# Altium PCB CAN Expansion V1.PcbDoc
Units mm, origin at the board's own origin, x right, y up, seen from the top; angles counter-clockwise.
Board outline 35.5 x 29.75 mm, 2 copper layers (Top Layer, Bottom Layer); 24 components, 27 nets, 121 pads, 17 vias.
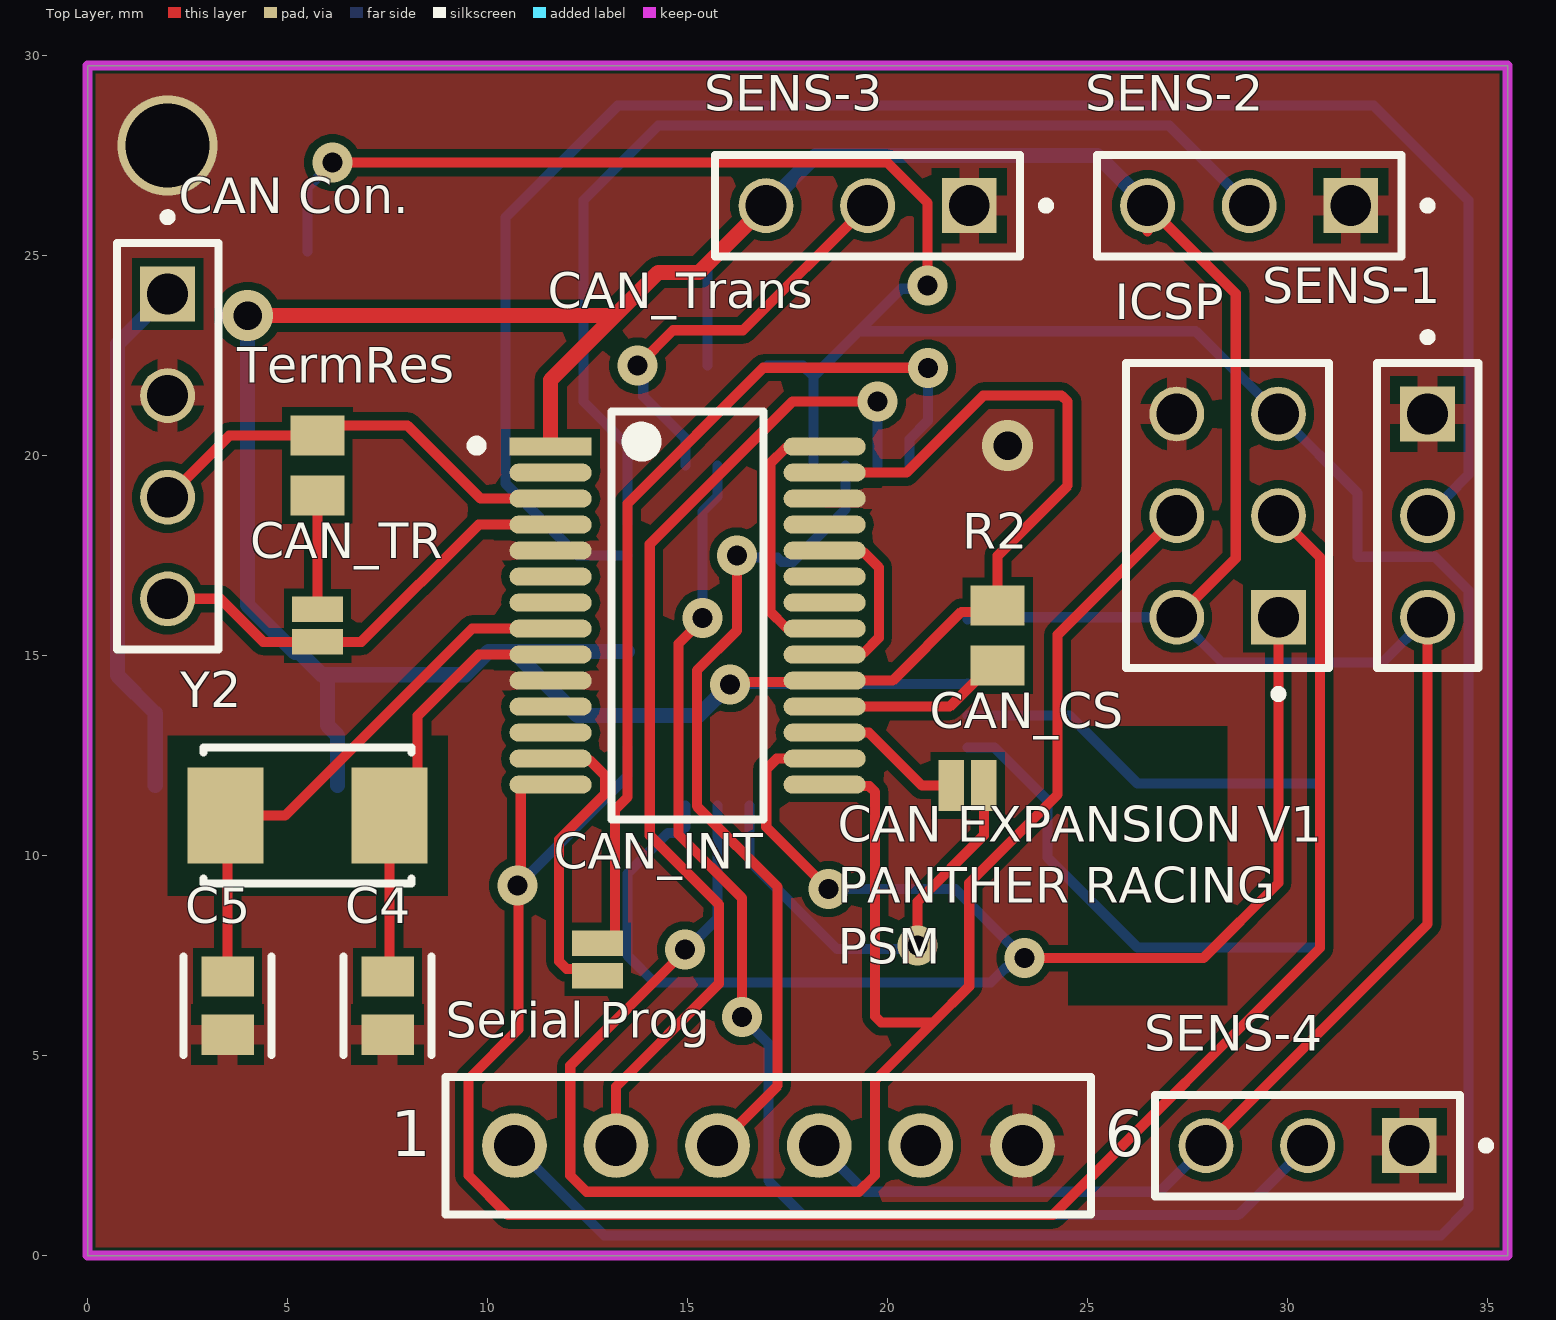
[diagram p0: Top Layer view]
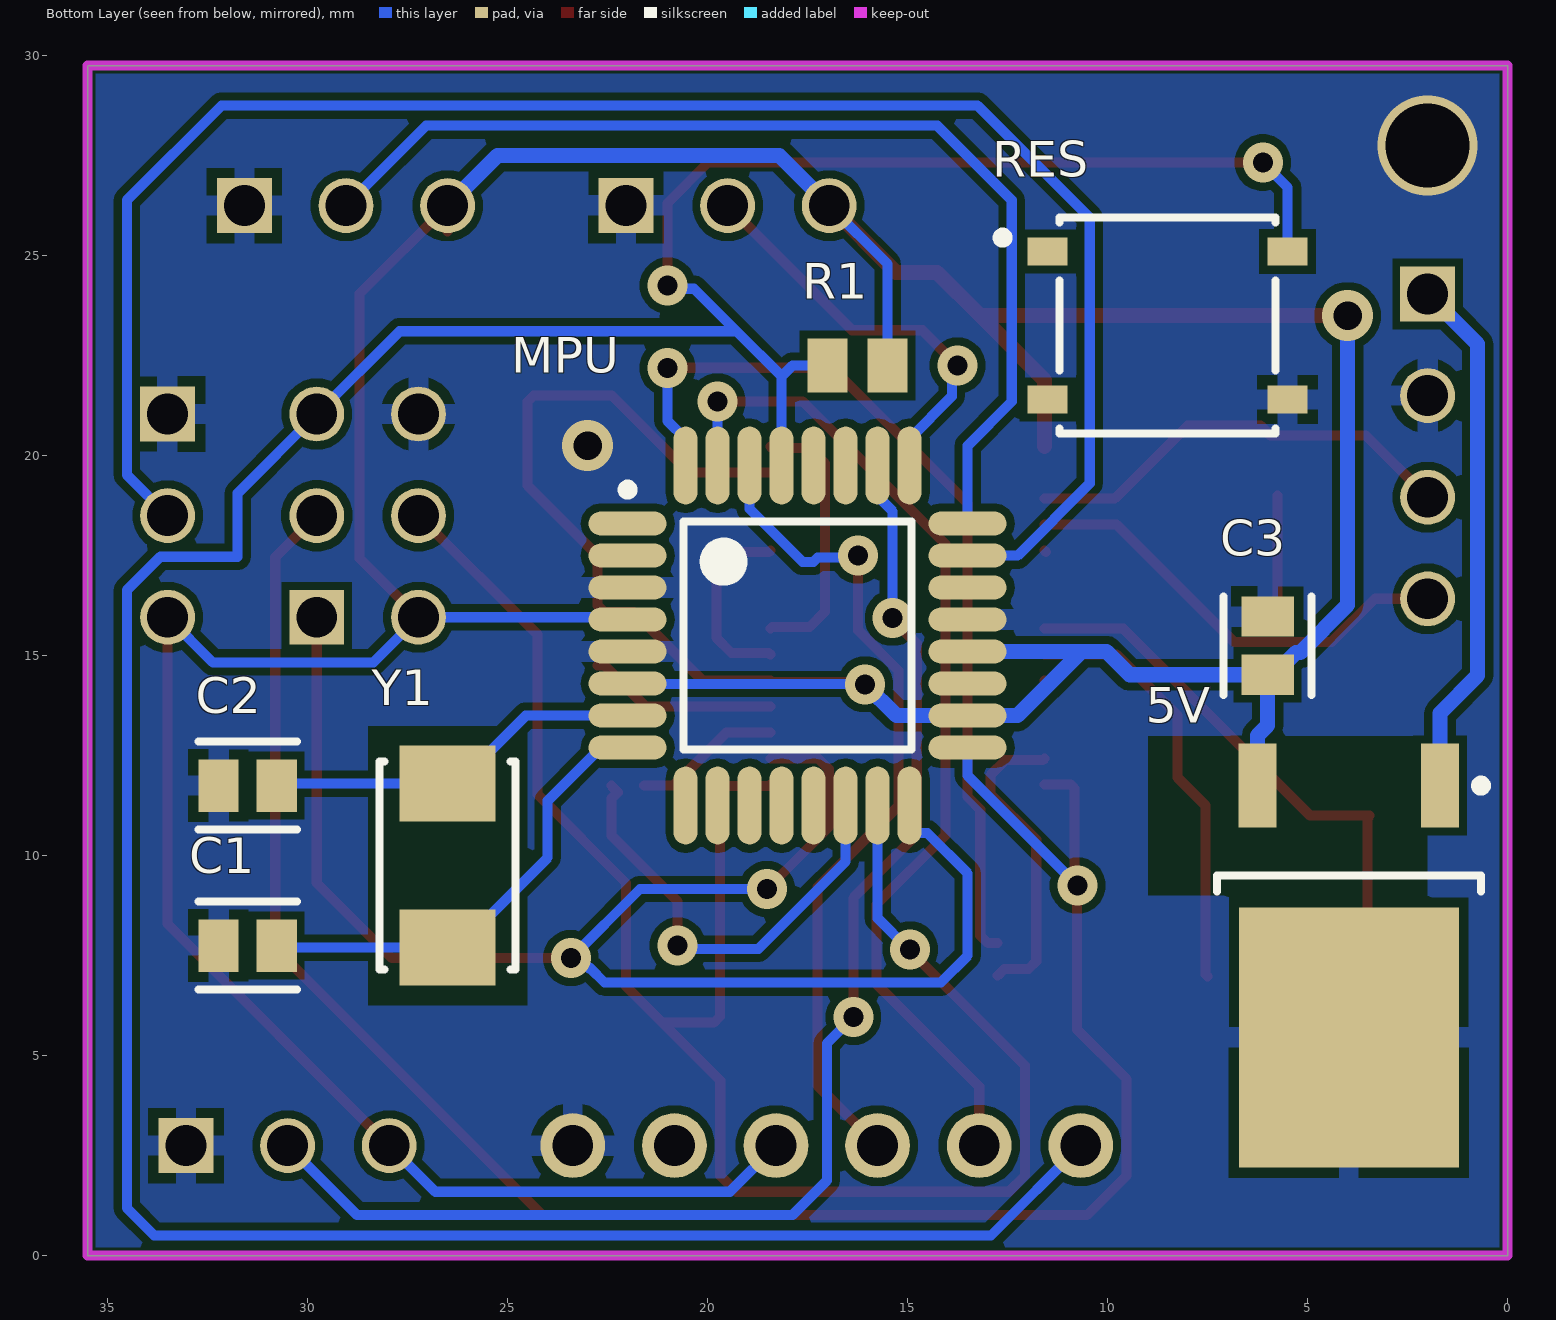
[diagram p1: Bottom Layer view, seen from below]
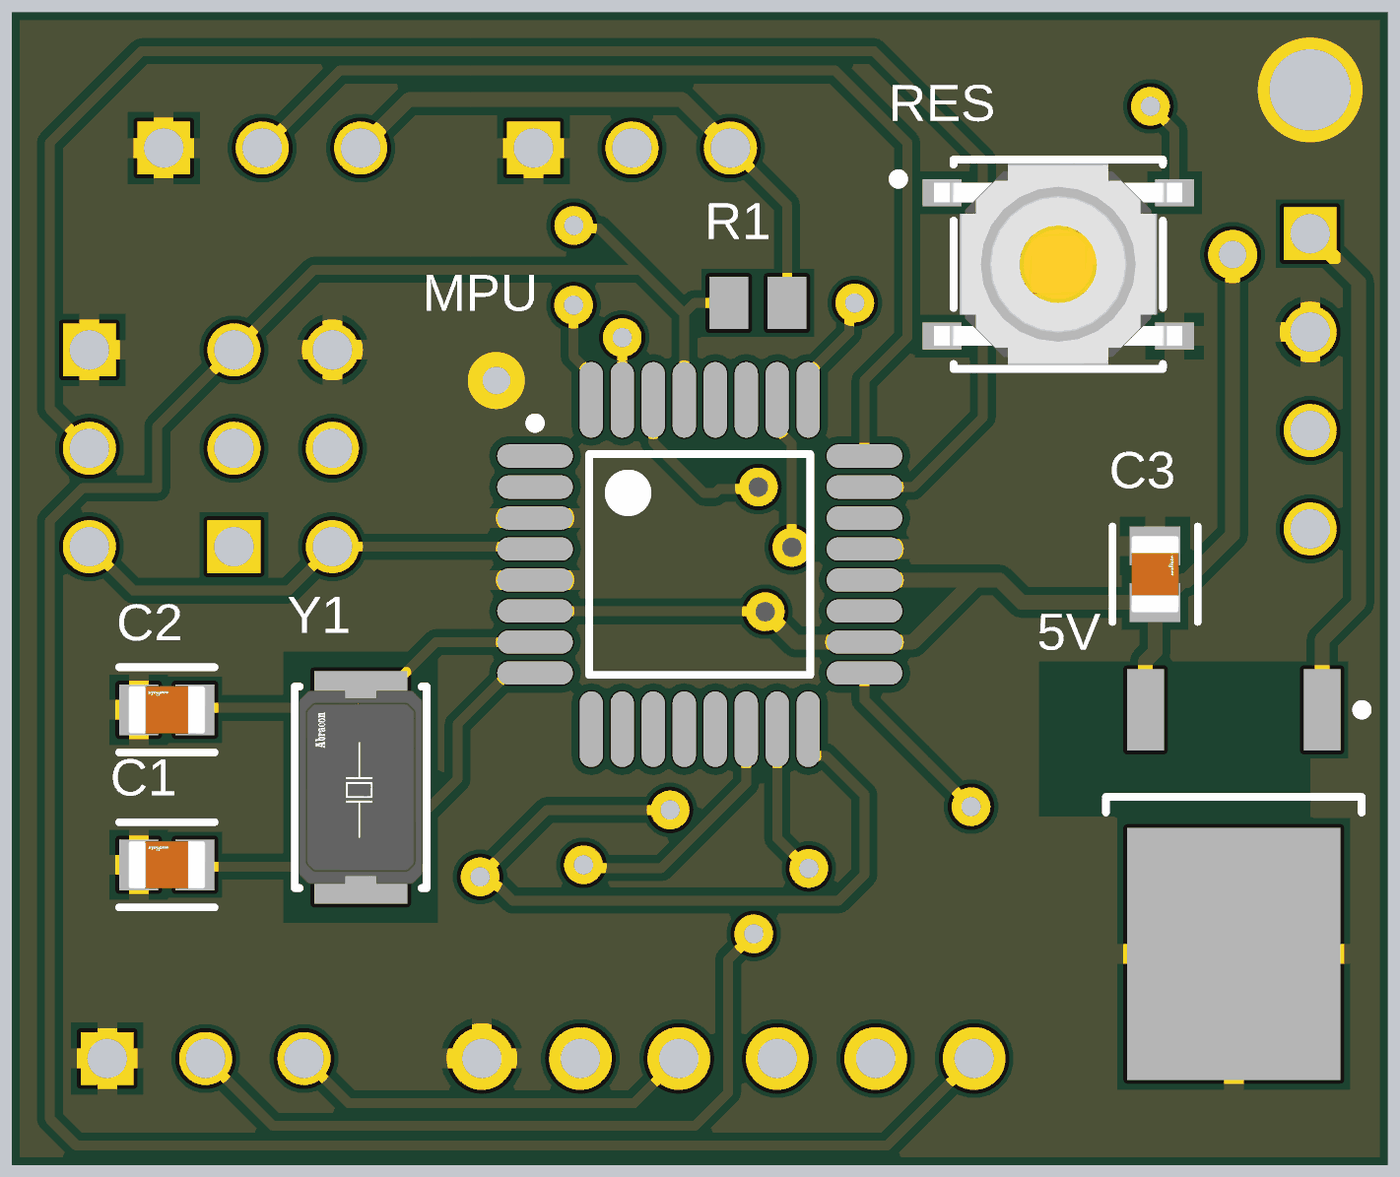
[diagram p2: 3D render of the assembled board from below, using the file's embedded part models]

## Layer stack, top to bottom
Top Solder: solder mask 0.0102, Solder Resist, Dk 3.5
Top Layer: signal copper 0.0356
Dielectric 1: dielectric 0.32, FR-4, Dk 4.8
Bottom Layer: signal copper 0.0356
Bottom Solder: solder mask 0.0102, Solder Resist, Dk 3.5

## Board outline
0,0 0,29.75 35.5,29.75 35.5,0

## Design rules (kind name [scope] priority, off if disabled: settings)
BoardOutlineClearance [All] p1: gap=0.2 ignorepadtopadclearanceinfootprint=FALSE except(0.4: Arc-SplitBarrior Arc-SplitContinuation Track-SplitBarrior Track-SplitContinuation SMDPad-SplitBarrior SMDPad-SplitContinuation THPad-SplitBarrior THPad-SplitContinuation Via-SplitBarrior Via-SplitContinuation Fill-SplitBarrior Fill-SplitContinuation Poly-SplitBarrior Poly-SplitContinuation Region-SplitBarrior Region-SplitContinuation Text-SplitBarrior Text-SplitContinuation)
Clearance "Clearance Bottom Layer" [OnLayer('Bottom Layer')] p1: gap=0.203 ignorepadtopadclearanceinfootprint=TRUE except(0.254: Arc-Text Track-Text SMDPad-Text THPad-Text Via-Text Fill-Text Poly-Text Region-Text Text-Text)
Clearance "Clearance Top Layer" [OnLayer('Top Layer')] p2: gap=0.203 ignorepadtopadclearanceinfootprint=TRUE except(0.254: Arc-Text Track-Text SMDPad-Text THPad-Text Via-Text Fill-Text Poly-Text Region-Text Text-Text)
Clearance [All] p3: gap=0.2 ignorepadtopadclearanceinfootprint=FALSE except(0.089: Arc-Arc Arc-Track Arc-SMDPad Track-Track Track-SMDPad SMDPad-SMDPad; 0.127: Arc-Via Track-Via SMDPad-Via THPad-Via Via-Via; 0.254: Arc-Text Track-Text SMDPad-Text THPad-Text Via-Text Fill-Text Poly-Text Region-Text Text-Text)
HoleSize [All] p1: absolutevalues=TRUE maxlimit=6.3 minlimit=0.2 maxpercent=80.000 minpercent=20.000
MinimumAnnularRing [All] p1: minimumring=0.076
MinimumSolderMaskSliver [All] p1: minsoldermaskwidth=0.1
PolygonConnect PolygonConnect_1 [All] p1: thpad.connectstyle=Relief thpad.reliefconductorwidth=0.508 thpad.reliefentries=4 thpad.polygonreliefangle="90 Angle" thpad.airgapwidth=0.254 smdpad.connectstyle=Relief smdpad.reliefconductorwidth=0.508 smdpad.reliefentries=4 smdpad.polygonreliefangle="90 Angle" smdpad.airgapwidth=0.254 via.connectstyle=Direct via.reliefconductorwidth=0.508 via.reliefentries=4 via.polygonreliefangle="90 Angle" via.airgapwidth=0.254
RoomDefinition "CAN Expansion V1" [InComponentClass('CAN Expansion V1')] p1: confinementstyle=ConfineIn formatcopy=TRUE lockcomponents=FALSE outline 0,0 35.5,0 35.5,29.75 0,29.75
RoutingCorners [All] p1: cornerstyle=Round minsetback=2.54 maxsetback=2.54
RoutingVias [All] p1: holewidth=0.5 width=1 viastyle="Through Hole" minholewidth=0.2 minwidth=0.45 maxholewidth=1 maxwidth=2
SilkToSilkClearance [All] p1: silktosilkclearance=0.1
SilkToSolderMaskClearance [IsPad] p1: minsilkscreentomaskgap=0.1 clearancetoexposedcopper=TRUE
SolderMaskExpansion [All] p1: expansion=0.102 istentingtop=FALSE
Width [All] p1: maxlimit=2.54 minlimit=0.089 preferedwidth=0.254
25 further rules are at their usual default settings.

## Components (designator, comment, footprint, x,y, rotation, side; value= is the part's Value field where it differs from the comment)
5V "L7805CDT-TR" TO-252_N 3.97,7.5 r270 bottom
C1 "22pf" FP-GRM21B-0_15-IPC_C#1 31.5,7.75 r0 bottom
C2 "22pf" FP-GRM21B-0_15-IPC_C#1 31.5,11.75 r0 bottom
C3 ".1uf" FP-GRM21B-0_15-IPC_C#2 6,15.25 r90 bottom
C4 "27pf" FP-GRM21B-0_15-IPC_C#1 7.5,6.25 r270 top
C5 "27pf" FP-GRM21B-0_15-IPC_C#1 3.5,6.25 r270 top
"CAN Con." "TSW-104-07-F-S" SAMTEC_TSW-104-07-F-S 2,20.23 r270 top
CAN_CS "" SMT-JUMPER_2_NO_SILK 22,11.75 r180 top
CAN_INT "" SMT-JUMPER_2_NO_SILK 12.75,7.406 r270 top
CAN_TR "" SMT-JUMPER_2_NO_SILK 5.75,15.75 r90 top
CAN_Trans "MCP25625T-E/SS" FP-C04-073-IPC_B 15,16 r0 top
ICSP "TSW-103-07-F-D" SAMTEC_TSW-103-07-F-D 28.5,18.5 r90 top
MPU "ATmega328P-AU" 32A_M 17.75,15.5 r180 bottom
R1 "10k" RESC2013X60X40LL20T25 16.25,22.25 r180 bottom
R2 "10k" RESC2013X60X40LL20T25 22.75,15.5 r90 top
RES "PTS526SK15SMTR2LFS" FP-PTS526SK15SMTR2LFS-MFG 8.5,23.25 r180 bottom
SENS-1 "TSW-103-07-F-S" SAMTEC_TSW-103-07-F-S 33.5,18.5 r270 top
SENS-2 "TSW-103-07-F-S" SAMTEC_TSW-103-07-F-S 29.04,26.25 r180 top
SENS-3 "TSW-103-07-F-S" SAMTEC_TSW-103-07-F-S 19.5,26.25 r180 top
SENS-4 "TSW-103-07-F-S" SAMTEC_TSW-103-07-F-S 30.5,2.75 r180 top
"Serial Prog" "SAMTEC-TSW-106-07-X-SJ" SAMTEC-TSW-106-07-X-S 17.02,2.75 r0 top
TermRes "120R" RESC2013X60X40LL20T25 5.75,19.75 r270 top
Y1 "ABM3-16.000MHZ-D2Y-T" FP-ABM3-MFG 26.5,9.75 r90 bottom
Y2 "ABM3-8.000MHZ-D2Y-T" FP-ABM3-MFG 5.5,11 r0 top

## Footprints (in the part's own frame and the unit in brackets; to place one, negate y for a bottom-side part, rotate by r counter-clockwise, add the part's x,y. Pads: shape width x height; smd on the part's side, far side on the other; paste and mask are expansions set on the pad)
32A_M [mm] "Thin QFP, 32-Leads, Body 7x7mm, Pitch 0.8mm, IPC Low Density"
  oval 1.95x0.6 smd mask+0.038: 1(-4.25,2.8) 2(-4.25,2) 3(-4.25,1.2) 4(-4.25,0.4) 5(-4.25,-0.4) 6(-4.25,-1.2) 7(-4.25,-2) 8(-4.25,-2.8) 17(4.25,-2.8) 18(4.25,-2) 19(4.25,-1.2) 20(4.25,-0.4) 21(4.25,0.4) 22(4.25,1.2) 23(4.25,2) 24(4.25,2.8)
  oval 0.6x1.95 smd mask+0.038: 9(-2.8,-4.25) 10(-2,-4.25) 11(-1.2,-4.25) 12(-0.4,-4.25) 13(0.4,-4.25) 14(1.2,-4.25) 15(2,-4.25) 16(2.8,-4.25) 25(2.8,4.25) 26(2,4.25) 27(1.2,4.25) 28(0.4,4.25) 29(-0.4,4.25) 30(-1.2,4.25) 31(-2,4.25) 32(-2.8,4.25)
  silkscreen extent -4.38,-2.85 2.85,3.77, body extent -3.5,-3.5 3.5,3.5, height 1.2
FP-ABM3-MFG [mm]
  rect 1.9x2.4 smd: 1(-2.05,0) 2(2.05,0)
  silkscreen extent -2.6,-1.7 2.6,1.7, body extent -2.5,-1.6 2.5,1.6, height 1.3
FP-C04-073-IPC_B [mm]
  rect 2.053x0.455 smd paste+0 mask+0.038: 1(-3.425,4.225)
  rrect100% 2.053x0.455 smd paste+0 mask+0.038: 2(-3.425,3.575) 3(-3.425,2.925) 4(-3.425,2.275) 5(-3.425,1.625) 6(-3.425,0.975) 7(-3.425,0.325) 8(-3.425,-0.325) 9(-3.425,-0.975) 11(-3.425,-2.275) 12(-3.425,-2.925) 13(-3.425,-3.575) 14(-3.425,-4.225) 15(3.425,-4.225) 16(3.425,-3.575) 17(3.425,-2.925) 18(3.425,-2.275) 19(3.425,-1.625) 20(3.425,-0.975) 21(3.425,-0.325) 22(3.425,0.325) 23(3.425,0.975) 24(3.425,1.625) 25(3.425,2.275) 26(3.425,2.925) 27(3.425,3.575) 28(3.425,4.225)
  rrect100% 2.053x0.455 smd mask+0.038: 10(-3.425,-1.625)
  silkscreen extent -5.4,-5.1 1.9,5.1, body extent -4.7,-5.35 4.7,5.35, height 0.25
FP-GRM21B-0_15-IPC_C#1 [mm]
  rect 1.006x1.308 smd: 1(-0.726,0) 2(0.726,0)
  silkscreen extent -1.23,-1.1 1.23,1.1, body extent -1,-0.63 1,0.63, height 1.4
FP-GRM21B-0_15-IPC_C#2 [mm]
  rect 1.006x1.308 smd paste+0 mask+0: 1(-0.726,0) 2(0.726,0)
  silkscreen extent -1.23,-1.1 1.23,1.1, body extent -1,-0.63 1,0.63, height 1.4
FP-PTS526SK15SMTR2LFS-MFG [mm]
  rect 1x0.7 smd paste+0 mask+0: 1(-3,1.85) 2(3,1.85) 3(-3,-1.85) 4(3,-1.85)
  silkscreen extent -4.25,-2.7 2.7,2.7, body extent -3.2,-2.6 3.2,2.6, height 1.65
RESC2013X60X40LL20T25 [mm] "Chip Resistor, 2-Leads, Body 2.00x1.25mm, IPC High Density"
  rect 1x1.35 smd: 1(-0.75,0) 2(0.75,0)
  body extent -1.1,-0.72 1.1,0.72, height 0.6
SAMTEC-TSW-106-07-X-S [mm]
  round 1.62 hole 1.02: 1(-6.35,0) 2(-3.81,0) 3(-1.27,0) 4(1.27,0) 5(3.81,0) 6(6.35,0)
  silkscreen extent -8.07,-1.72 8.07,1.72
SAMTEC_TSW-103-07-F-D [mm]
  rect 1.37x1.37 hole 1.02: 01(-2.54,-1.27)
  round 1.37 hole 1.02: 02(-2.54,1.27) 03(0,-1.27) 04(0,1.27) 05(2.54,-1.27) 06(2.54,1.27)
  silkscreen extent -4.56,-2.54 3.81,2.54
SAMTEC_TSW-103-07-F-S [mm]
  rect 1.37x1.37 hole 1.02: 01(-2.54,0)
  round 1.37 hole 1.02: 02(0,0) 03(2.54,0)
  silkscreen extent -4.56,-1.27 3.81,1.27
SAMTEC_TSW-104-07-F-S [mm]
  rect 1.37x1.37 hole 1.02: 01(-3.81,0)
  round 1.37 hole 1.02: 02(-1.27,0) 03(1.27,0) 04(3.81,0)
  silkscreen extent -5.83,-1.27 5.08,1.27
SMT-JUMPER_2_NO_SILK [mil]
  rect 25x50 smd paste+0: 1(-16,0) 2(16,0)
TO-252_N [mm] "D-PAK, 4-Leads, Body 6.1x6.5mm, Pitch 2.28mm, Lead Span 9.7mm, IPC Medium Density"
  rect 2.1x0.95 smd: 1(-4.25,2.28) 3(-4.25,-2.28)
  rect 6.5x5.5 smd: 4(2.05,0)
  silkscreen extent -4.37,-3.3 -1.6,3.43, body extent -2,-3.3 4.2,3.3, height 2.4

## Part data
5V: library part CMP-0244-00216-1, "Positive Voltage Regulator, 3-Pin DPAK, Tape and Reel", ComponentLink1Description="Manufacturer URL", ComponentLink1URL=http://www.st.com, ComponentLink2Description=Datasheet, ComponentLink2URL=http://www.st.com/internet/com/TECHNICAL_RESOURCES/TECHNICAL_LITERATURE/DATASHEET/CD00000444.pdf, DatasheetVersion=16/11/2011, PackageDescription="3-Pin Transistor Outline Package 2.28 mm Pitch, 9.7 mm Lead Span (DPAK)", PackageReference=TO-252, PackageVersion=2011
C1 C2 C3 C4 C5: library part CMP-2007-03541-2, "Chip Multilayer Ceramic Capacitors for General Purpose, 0805, 10uF, X5R, 15%, 10%, 25V", Capacitance=10uF, Case Code (Imperial)=0805, Case Code (Metric)=2012, Dielectric=X5R, Max Operating Temperature=85°C, Min Operating Temperature=-55°C, Package Quantity=1, Tolerance=10%, Voltage=25V, Case/Package=0805, Depth=1.25mm, Height=1.25mm, Lead Free="Lead Free", Length=2mm, Material=Ceramic, Mount="Surface Mount", Packaging="Tape and Reel", Radiation Hardening=No, Termination=SMD/SMT, Thickness=0.053inch, Voltage Rating=25V, Voltage Rating (DC)=25V, Width=0.049inch
"CAN Con." ICSP SENS-1 SENS-2 SENS-3 SENS-4: Package=None, Availability=Unavailable, MF=Samtec, Price=None
  "CAN Con.": MP=TSW-104-07-F-S
  ICSP: MP=TSW-103-07-F-D
  SENS-1 SENS-2 SENS-3 SENS-4: MP=TSW-103-07-F-S
CAN_CS CAN_INT CAN_TR: library part JUMPER-SMT_2_NO_SILK, Package=SMT-JUMPER_2_NO_SILK, DeviceName=_SILK, DeviceSetName=JUMPER-SMT_2_NO, GateName_1=G$1, LibraryName=SparkFun-Jumpers, SymbolName_1=SMT-JUMPER_2_NO
CAN_Trans: library part CMP-06279-000016-1, "IC TRANSCEIVER 1/1 28SSOP", Case/Package=SSOP, Max Operating Temperature=125°C, Max Supply Voltage=5.5V, Min Operating Temperature=-40°C, Min Supply Voltage=4.5V, Operating Supply Current=70mA, Package Quantity=2100, Data Rate=1Mbps, Interface=SPI, Mount="Surface Mount", Number of Drivers=1, Number of Pins=28, Number of Receivers=1, Number of Transceivers=1, Packaging="Tape and Reel", Propagation Delay=125ns, Receiver Hysteresis=200mV, RoHS Compliant=Yes, Weight=0.080001oz
MPU: library part CMP-0095-00269-2, "8-bit AVR Microcontroller, 32KB Flash, 1KB EEPROM, 2KB SRAM, 32-pin TQFP, Industrial Grade (-40°C to 85°C)", Code_JEDEC=MS-026-ABA, ComponentLink1Description="Manufacturer URL", ComponentLink1URL=http://www.atmel.com/, ComponentLink2Description="ATmega48A/48PA/88A/88PA/168A/168PA/328/328P Datasheet", ComponentLink2URL=http://www.atmel.com/dyn/resources/prod_documents/doc8271.pdf, ComponentLink3Description="ATmega48A/48PA/88A/88PA/168A/168PA/328/328P Summary", ComponentLink3URL=http://www.atmel.com/dyn/resources/prod_documents/8271S.pdf, DatasheetVersion="revD, May-2011", PackageDescription="32-Lead, 7x7x1.0 mm Body, 0.8mm Lead Pitch, Thin Profile Plastic Quad Flat Package (TQFP)", PackageReference=32A, PackageVersion="revC, Oct-2010", RevisionNote="DatasheetVersion & PackageVersion updated. URLs added."
R1 R2 TermRes: library part CMP-2001-00645-1, Manufacturer=Panasonic, Part Number=ERA6AEB473V
RES: library part CMP-10040-000013-1, "TACT 5.2 X 5.2, 1.5 MM H, 260GF,", Contact Current Rating=50mA, Contact Resistance=100mΩ, Manufacturer=C&K, Operating Force=250gf, Temperature="-20°C to +70°C", Temperature Range High=+70°C, Temperature Range Low=-20°C, Voltage Rating Dc=12V, Automotive=No, Category=Switch, ComponentLink2Description=Datasheet, ComponentLink2URL=https://www.ckswitches.com/media/2780/pts526.pdf, Device Class L1=Electromechanical, Device Class L2=Switches, Device Class L3="Tactile Switches", Digikey Description="TACT 5.2 X 5.2, 1.5 MM H, 260GF,", Electromechanical Life=200000Cycles, Height=1.65mm, Lead Free=Yes, Manufacturer Part Number=PTS526SK15SMTR2LFS, Octopart=https://octopart.com/pts526+sk15+smtr2+lfs-c%26k+components-100617999, Package=PTS526SK15SMTR2LFS, RoHS=TRUE, Standoff Height=0mm, Throw Configuration=SPST-NO
Y1: library part CMP-27762-004490-1, "Crystal 16MHz ±20ppm 18pF SMD-2 5mm x 3.2mm", Case/Package=SMD/SMT, ESR (Equivalent Series Resistance)=40R, Frequency=16MHz, Frequency Stability=30ppm, Frequency Tolerance=20ppm, Load Capacitance=18pF, Max Operating Temperature=85°C, Min Operating Temperature=-40°C, Operating Frequency="16 MHz", Package Quantity=1000, Resistor Type=Ceramic, Height=0.051inch, Lead Free="Lead Free", Length=0.197inch, Mount="Surface Mount", Number of Pins=2, Packaging="Tape and Reel", RoHS Compliant=Yes, Series=ABM3, Series Resistance=40R, Termination=SMD/SMT, Tolerance=20ppm, Width=0.126inch
Y2: library part CMP-2000-05033-2, "Crystal 8MHz ±20ppm 18pF SMD-2 5mm x 3.2mm", Case/Package=CSMD, ESR (Equivalent Series Resistance)=140R, Frequency=8MHz, Frequency Stability=30ppm, Frequency Tolerance=20ppm, Load Capacitance=18pF, Max Operating Temperature=85°C, Min Operating Temperature=-40°C, Package Quantity=1000, Resistor Type=Ceramic, Series Resistance=500R, Depth=3.2mm, Height=0.051inch, Lead Free="Lead Free", Length=5mm, Mount="Surface Mount", Number of Pins=2, Packaging="Tape and Reel", Radiation Hardening=No, RoHS Compliant=Yes, Termination=SMD/SMT, Tolerance=20ppm, Width=3.2mm

## Via types
v1: diameter 1, hole 0.5, Top Layer to Bottom Layer, 14 vias
v2: diameter 1.27, hole 0.711, Top Layer to Bottom Layer, 2 vias
v3: diameter 2.5, hole 2.1, Top Layer to Bottom Layer, 1 vias

## Nets (pads, with @x,y where several pads share a name; then routed paths per layer and width w, separated by ;. In a path a pad name is that pad's centre, name@x,y a point inside that pad or via, vN(x,y) a via of type N, cw(c..) or ccw(c..) an arc to the next point about the centre after c; other vN are vias at no path point)
A0: MPU.23 SENS-1.02 | length 44.3
  Bottom Layer w0.254: MPU.23 12.25,17.5 10.445,19.305 10.445,25.945 13.25,28.75 32.155,28.75 34.519,26.386 34.519,19.519 34,19
A1: MPU.24 SENS-2.02 | length 26.8
  Bottom Layer w0.254: MPU.24 13.5,20.25 12.395,21.355 12.395,26.386 14.259,28.25 27.04,28.25 SENS-2.02
A2: MPU.25 SENS-3.02 | length 10.4
  Top Layer w0.254: v1(13.75,22.25) 14.635,23.135 16.385,23.135 SENS-3.02
  Bottom Layer w0.254: v1(13.75,22.25) 13.893,22.107 13.893,21.482 14.95,20.425 MPU.25
A3: MPU.26 SENS-4.02 | length 33.8
  Top Layer w0.254: v1(15.374,15.944) 15.374,15.9 14.773,15.299 14.773,10.527 16.356,8.945 v1(16.356,5.966)
  Bottom Layer w0.254: v1(15.374,15.944) 15.374,18.606 15.75,18.981 MPU.26 ; v1(16.356,5.966) 17.018,5.304 17.018,1.875 17.882,1.012 28.762,1.012 SENS-4.02
CAN_CS: CAN_CS.2 CAN_Trans.17 | length 3.7
  Top Layer w0.254: CAN_Trans.17 19.534,13.075 20.859,11.75 CAN_CS.2
CAN_INT: CAN_INT.2 CAN_Trans.13 | length 7.8
  Top Layer w0.254: CAN_Trans.13 11.613,12.387 12.551,12.387 12.931,12.006 12.931,11.542 11.785,10.395 11.785,7.359 11.978,7.165 12.585,7.165 CAN_INT.2
CAN_MISO: CAN_Trans.16 ICSP.01 MPU.16 | length 39.6
  Top Layer w0.254: CAN_Trans.16 17.23,12.425 16.967,12.162 16.967,10.715 v1(18.517,9.165) ; v1(23.419,7.438) 27.89,7.438 29.77,9.318 ICSP.01
  Bottom Layer w0.254: MPU.16 14.95,10.723 14.79,10.563 14.506,10.563 13.5,9.557 13.5,7.5 14.174,6.826 22.576,6.826 22.934,7.184 22.963,7.184 23.217,7.438 v1(23.419,7.438) 21.692,9.165 v1(18.517,9.165)
CAN_MOSI: CAN_Trans.15 ICSP.04 MPU.15 | length 46.8
  Top Layer w0.254: v1(14.935,7.657) 14.935,7.616 12.065,4.746 12.065,2.002 12.471,1.596 19.279,1.596 19.685,2.002 19.685,4.38 21.133,5.828 ; CAN_Trans.15 18.462,11.738 19.54,11.738 19.688,11.589 19.688,5.976 19.837,5.828 21.133,5.828 ; ICSP.04 24.25,15.52 24.25,11.526 22.039,9.315 22.039,6.734 21.133,5.828
  Bottom Layer w0.254: v1(14.935,7.657) 14.976,7.657 15.75,8.431 MPU.15
CAN_RX: CAN_Trans.21 CAN_Trans.28 | length 6.8
  Top Layer w0.254: CAN_Trans.21 18.387,15.713 17.449,15.713 17.068,16.094 17.068,19.806 17.449,20.187 18.387,20.187 CAN_Trans.28
CAN_SCK: CAN_Trans.14 ICSP.03 MPU.17 | length 51.3
  Top Layer w0.254: v1(10.75,9.25) v1@10.77,9.27 ; CAN_Trans.14 10.919,11.775 10.826,11.682 10.826,9.326 v1@10.77,9.27 ; ICSP.03 30.81,17.46 30.81,7.692 24.13,1.012 10.516,1.012 9.525,2.002 9.525,4.415 10.77,5.66 v1@10.77,9.27
  Bottom Layer w0.254: v1(10.75,9.25) 13.5,12 MPU.17
CAN_TX: CAN_Trans.20 CAN_Trans.24 | length 4.8
  Top Layer w0.254: CAN_Trans.20 18.464,15.063 19.401,15.063 19.782,15.444 19.782,17.206 19.401,17.587 18.464,17.587 CAN_Trans.24
CANH: "CAN Con..04" CAN_TR.1 CAN_Trans.4 | length 11.2
  Top Layer w0.254: 2,16.42 3.316,16.42 4.393,15.344 CAN_TR.1 6.844,15.344 9.775,18.275 CAN_Trans.4
CANL: "CAN Con..03" CAN_Trans.3 TermRes.1 | length 11.1
  Top Layer w0.254: 2,18.96 3.54,20.5 TermRes.1 5.925,20.5 6.175,20.75 8,20.75 9.825,18.925 CAN_Trans.3
CS: CAN_CS.1 MPU.14 | length 11.4
  Top Layer w0.254: v1(20.75,7.75) 20.75,8.851 22.406,10.508 22.406,11.42 22.241,11.585 CAN_CS.1
  Bottom Layer w0.254: MPU.14 16.55,9.851 18.734,7.667 20.667,7.667 v1(20.75,7.75)
D0: "Serial Prog.3" MPU.30 | length 21
  Top Layer w0.254: 15.75,2.75 17.25,4.25 17.25,9.217 15.231,11.237 15.231,14.626 16.238,15.634 v1(16.238,17.5)
  Bottom Layer w0.254: v1(16.238,17.5) 16.286,17.452 17.246,17.452 17.354,17.344 17.629,17.344 18.95,18.665 MPU.30
D1: "Serial Prog.2" MPU.31 | length 25.6
  Top Layer w0.254: 13.21,2.75 13.21,4.225 15.781,6.796 15.781,8.781 14.054,10.508 14.054,17.784 17.628,21.357 v1(19.75,21.357)
  Bottom Layer w0.254: MPU.31 v1(19.75,21.357)
D2: CAN_INT.1 MPU.32 | length 23
  Top Layer w0.254: CAN_INT.1 12.992,7.813 13.183,8.003 13.183,11.146 13.5,11.464 13.5,18.804 16.891,22.195 v1(21.006,22.195)
  Bottom Layer w0.254: MPU.32 20.55,20.417 21.006,20.873 v1(21.006,22.195)
GND: 5V.4 "CAN Con..02" "Serial Prog.6" C1.2 C2.2 C3.2 C4.2 C5.2 CAN_Trans.5 CAN_Trans.10 CAN_Trans.26 ICSP.06 MPU.3 MPU.5 MPU.21 RES.4 SENS-1.01 SENS-2.01 SENS-3.01 SENS-4.01 | length 0.1
  Top Layer w0.254: CAN_Trans.10@11.536,14.337 CAN_Trans.10 ; CAN_Trans.5@11.536,17.587 CAN_Trans.5
  other v2: 23,20.25
  other v3: 2,27.75
NetC1_1: C1.1 MPU.8 Y1.1 | length 11.7
  Bottom Layer w0.254: MPU.8 22.675,12.7 24,11.375 24,9.95 26.25,7.7 Y1.1 30.724,7.7 C1.1
NetC2_1: C2.1 MPU.7 Y1.2 | length 9.5
  Bottom Layer w0.254: MPU.7 24.55,13.5 26.25,11.8 Y1.2 30.724,11.8 C2.1
NetC4_1: C4.1 CAN_Trans.9 Y2.2 | length 10.8
  Top Layer w0.254: C4.1 7.55,7.026 Y2.2 7.55,11.25 8.25,11.95 8.25,13.5 9.775,15.025 CAN_Trans.9
NetC5_1: C5.1 CAN_Trans.8 Y2.1 | length 14.1
  Top Layer w0.254: C5.1 3.5,10.95 Y2.1 4.933,11 9.608,15.675 CAN_Trans.8
NetCAN_TR_2: CAN_TR.2 TermRes.2 | length 2.8
  Top Layer w0.254: CAN_TR.2 TermRes.2
NetCAN_Trans_18: CAN_Trans.18 R2.1 | length 4.7
  Top Layer w0.254: CAN_Trans.18 21.55,13.725 22.575,14.75 R2.1
"PWR IN": 5V.1 "CAN Con..01" | length 13.2
  Bottom Layer w0.381: 5V.1 1.69,13.56 0.75,14.5 0.75,22.79 2,24.04
RESET: "Serial Prog.1" ICSP.05 MPU.29 R1.1 RES.2 | length 86.5
  Top Layer w0.254: v1(6.121,27.326) 19.99,27.326 21,26.316 v1(21,24.25)
  Bottom Layer w0.254: RES.2 5.5,26.702 6.121,27.323 v1(6.121,27.326) ; 10.67,2.75 12.916,0.504 33.833,0.504 34.519,1.19 34.519,16.633 33.68,17.471 31.75,17.471 31.75,19.06 ICSP.05 27.7,23.11 19.507,23.11 19.278,23.11 ; R1.1 17.882,22.25 18.15,21.982 ; MPU.29 18.15,21.982 ; v1(21,24.25) 20.922,24.172 20.34,24.172 19.278,23.11 ; 18.15,21.982 19.278,23.11
VCC: 5V.3 "Serial Prog.4" C3.1 CAN_Trans.1 CAN_Trans.19 CAN_Trans.27 ICSP.02 MPU.4 MPU.6 MPU.18 MPU.20 R1.2 R2.2 SENS-1.03 SENS-2.03 SENS-3.03 SENS-4.03 | length 137.4
  Top Layer w0.254: v1(16.061,14.282) 16.115,14.337 18.387,14.337 CAN_Trans.19 20.125,14.375 21.843,16.093 22.593,16.093 R2.2 22.75,17.5 24.5,19.25 24.5,21.351 24.351,21.5 22.392,21.5 20.467,19.575 CAN_Trans.27 ; SENS-2.03@26.5,25.608 SENS-2.03 28.702,24.048 28.702,17.432 ICSP.02 ; SENS-4.03 33.5,8.29 SENS-1.03
  Top Layer w0.381: v2(4,23.5) 13.184,23.5 ; CAN_Trans.1 11.575,21.891 13.184,23.5 ; SENS-3.03 15.29,24.58 14.264,24.58 13.184,23.5
  Bottom Layer w0.254: R1.2 15.5,24.79 SENS-3.03 ; v1@16.07,14.291 21.991,14.291 MPU.6 ; 18.29,2.75 19.444,1.596 26.806,1.596 SENS-4.03 ; MPU.4 22.06,15.96 ICSP.02 28.361,14.829 32.369,14.829 SENS-1.03
  Bottom Layer w0.381: v2(4,23.5) 4,16.263 5.183,15.08 5.293,15.08 5.849,14.524 C3.1 ; 5V.3 6.25,13.001 6,13.251 C3.1 ; MPU.20 10.65,15.1 ; v1@16.07,14.291 v1(16.061,14.282) 15.278,13.5 12.25,13.5 10.65,15.1 ; SENS-3.03 18.21,27.5 25.25,27.5 SENS-2.03 ; C3.1 9.449,14.524 10.025,15.1 10.65,15.1
pads on no net: "Serial Prog.5" CAN_Trans.2 CAN_Trans.6 CAN_Trans.7 CAN_Trans.11 CAN_Trans.12 CAN_Trans.22 CAN_Trans.23 CAN_Trans.25 MPU.1 MPU.2 MPU.9 MPU.10 MPU.11 MPU.12 MPU.13 MPU.19 MPU.22 MPU.27 MPU.28 RES.1 RES.3

## Polygon pours and split planes (outlines as drawn)
GND on Bottom Layer "GND_L02_P001" (solid, pour order 1): 35.5,29.75 0,29.75 0,0 35.5,0
GND on Top Layer "GND_L01_P000" (solid, pour order 0): 35.5,29.75 0,29.75 0,0 35.5,0

## Keep-outs
Keep-Out Layer:
  the board outline again, w0.254

## Other copper
Top Layer:
  pour cut-out: 24.5,6.25 28.5,6.25 28.5,13.25 24.5,13.25
  pour cut-out: 2,13 2,9 9,9 9,13
Bottom Layer:
  pour cut-out: 24.5,6.25 24.5,13.25 28.5,13.25 28.5,6.25
  pour cut-out: 2,13 9,13 9,9 2,9

## Silkscreen, mask and mechanical layers (free items; w line width, h text height)
Top Overlay:
  text "CAN EXPANSION V1 / PANTHER RACING / PSM" at 18.75,7 h1.52

## Text inside footprints (layer, text, board x,y; h text height)
"Serial Prog": Top Component Center "6" at 25.431,2.115 h1.97; Top Component Center "1" at 7.58,2.115 h1.97; Top Overlay "6" at 25.431,2.115 h1.97; Top Overlay "1" at 7.58,2.115 h1.97; Mechanical 40 "12.700" at 16.22,5.925 h0.39; Mechanical 40 "15.240" at 16.22,-1.632 h0.39; Mechanical 40 "2.540" at 8.105,4.464 h0.39; Mechanical 40 "2.540" at 2.517,2.623 h0.39